# Altium PCB EBC.PcbDoc (part 2 of 2)
Units mil, origin at the board's own origin, x right, y up, seen from the top; angles counter-clockwise.
Board outline 3271.95 x 1972.47 mil, 2 copper layers (Top Layer, Bottom Layer), stack 12.8 mil thick; 145 components, 128 nets, 444 pads, 34 vias.
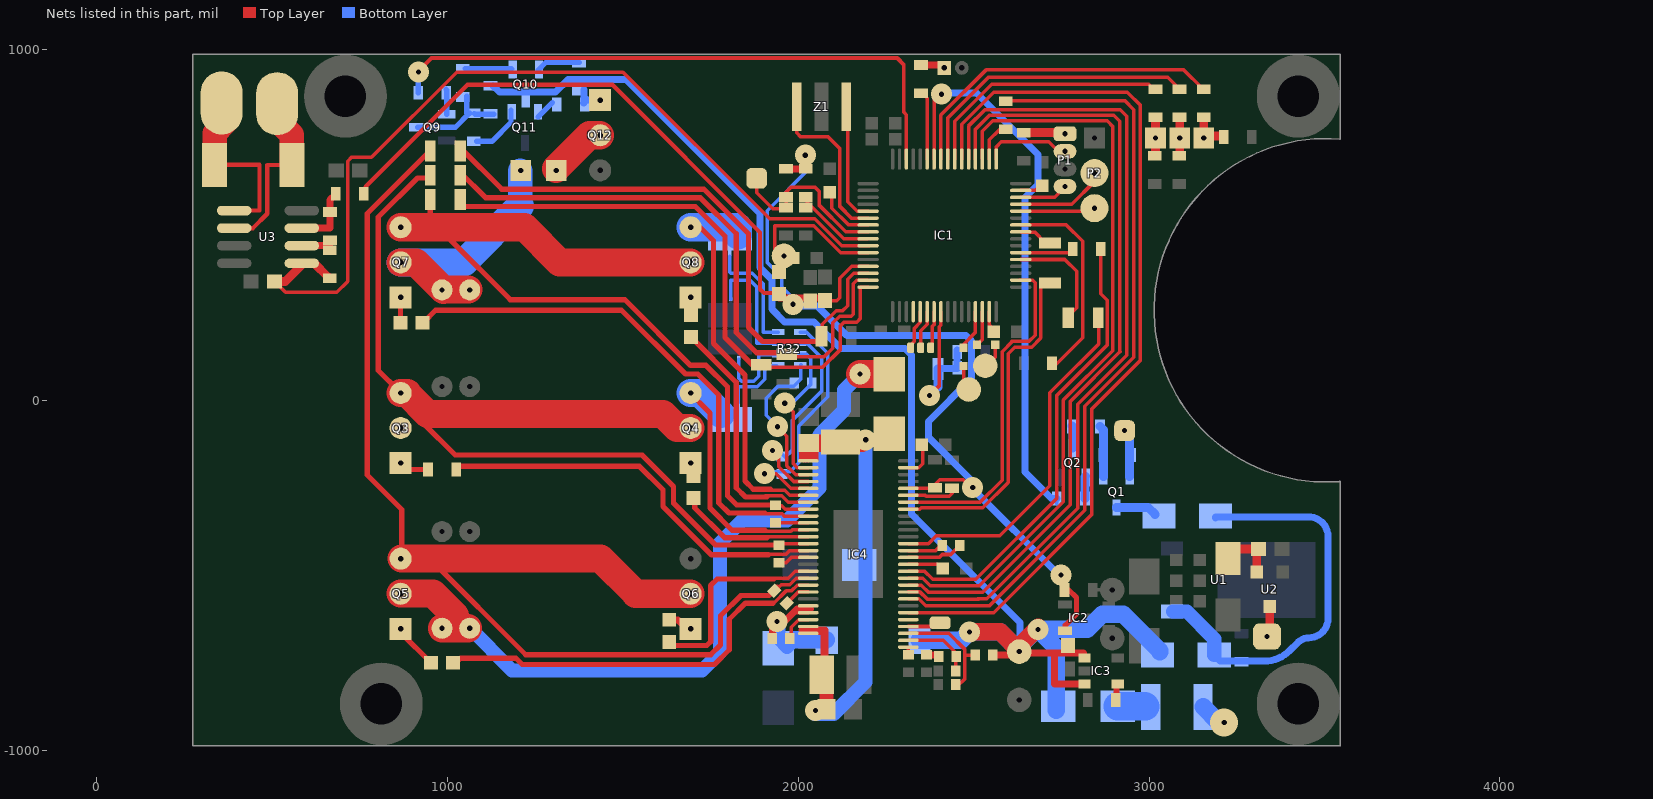
[diagram p2: the nets of this part, all layers, seen from the top]

## Via types
v1: diameter 60, hole 15, Top Layer to Bottom Layer, 33 vias
v2: diameter 80, hole 15, Top Layer to Bottom Layer, 1 vias

## Nets (pads, with @x,y where several pads share a name; then routed paths per layer and width w, separated by ;. In a path a pad name is that pad's centre, name@x,y a point inside that pad or via, vN(x,y) a via of type N, cw(c..) or ccw(c..) an arc to the next point about the centre after c; other vN are vias at no path point) (continued)
_DRV_PWR: C35.1 C36.1 C37.1 C41.1 D5.2 D6.2 IC4.29 IC4.53 IC4.54 | length 1796.2
  Top Layer w10: IC4.29@2006.17,-172.16 C36.1@2006.17,-129.56 ; IC4.29@2015.17,-173.16 C36.1@2015.17,-130.56 ; IC4.29@2021.17,-173.16 C36.1@2021.17,-130.56 ; C36.1@2027.94,-129.33 2028.17,-129.56 2028.17,-130.56 IC4.29@2028.17,-173.16 ; IC4.54@2028.17,-665.28 2068,-665.28 C37.1@2068,-768 ; IC4.29@2038.17,-170.16 C36.1@2038.17,-127.56 ; IC4.29@2048.17,-170.16 C36.1@2048.17,-127.56 ; IC4.29@2052.17,-170.16 C36.1@2052.17,-127.56 ; C37.1@2076.94,-789.33 C37.1@2076.94,-783.33
  Top Layer w20: 2011,-655 2076,-655 2076,-774.12 C37.1@2066.79,-783.33 ; C36.1@2022.79,-125.18 C36.1@2028.17,-130.56 ; v1@2182.54,-122.73 v1(2191.94,-113.33)
  Top Layer w40: v1@2049.2,-889.77 v1(2049.2,-885) ; C41.1@2080.54,-881.33 C37.1@2080.54,-780.73
  Top Layer w50: C36.1@2029.94,-122.73 v1@2182.54,-122.73
  Bottom Layer w40: v1@2047.54,-894.35 2100.92,-894.35 2190.94,-804.33 2190.94,-119.33 2191.94,-118.33 v1(2191.94,-113.33)
_REF: C1.1 C3.1 C17.1 C32.1 IC1.13 IC2.2 IC4.24 R18.1 R22.1 R23.1 R26.2 | length 4445.3
  Top Layer w10: C1.1@2071,284 2072,283 2109,283 2118,292 2118,347 2152.02,381.02 IC1.13@2198.8,381.02 ; IC4.24@2313.6,-251.9 C32.1@2389.37,-251.9 ; C32.1@2389.94,-240.33 2402.94,-227.33 2469.94,-227.33 v1@2496.94,-254.33
  Top Layer w12: R26.2@766,584 766,608 1057,899 1470,899 1891,478 1891,316 1902,305 R22.1@1942,305
  Top Layer w15: v1(2749,-499) 2749,-493.27 2760.94,-481.33 2760.94,-541.33 2770.94,-541.33 2792.94,-563.33 2792.94,-610.33 2760.94,-642.33 IC2.2@2760.94,-656.33
  Top Layer w20: R22.1@1944.33,290.44 C1.1@2080.83,290.44 ; R18.1@1965,659 R23.1@2021,659 2022,659 2028,665 2020,673 v1(2020,698)
  Bottom Layer w10: v1(1985,273) 1985,290 1952,323 1952,351 1911,392 1911,540 2031,660 v1@2031,697
  Bottom Layer w20: v1@2001,273 2006,268 2054,268 2138,184 2478,184 2493,169 2493,61 2371,-61 2371,-106 2496.94,-231.94 v1(2496.94,-249.33) 2496.94,-252.94 2736,-492 v1@2749,-492
AN_IN: C8.1 IC1.24 R14.2 R15.1 | length 448.4
  Top Layer w10: v1(2374,13) 2401,40 2401,208 2406.47,213.47 IC1.24@2406.47,252.08
  Bottom Layer w20: R14.2@2398.09,88 2398.09,90 R15.1@2452,90 ; C8.1@2452,143 R15.1@2452,90 ; R15.1@2453,90 R15.1@2452,90
  Bottom Layer w25: v1(2374,13) 2398,37 R14.2@2398,89
BUCK: C9.1 C11.1 D1.1 D2.1 IC3.1 IC3.3 L1.2 Q10.3 R31.1 R48.1 | length 4424.5
  Top Layer w20: R31.1@2554,-727 2612,-727 C9.1@2620,-719 ; C9.1@2632,-709 C9.1@2653.27,-709 ; C9.1@2634.33,-721.33 2729.94,-721.33 ; IC3.1@2812.94,-733.33 2812.94,-721.33 2729.94,-721.33 ; IC3.3@2815.69,-809.73 2729.94,-809.73 2729.94,-721.33
  Top Layer w50: v1(2488,-661) 2575,-661 C9.1@2629,-715 ; C9.1@2630,-717.1 C9.1@2630,-703 ; C9.1@2630,-702 v1@2684,-648
  Bottom Layer w20: R48.1@1130,896 1148,878 1308,878 1344,914 1509,914 1890,533 1890,378 1925,343 1925,259 1961,223 2045,223 2121,147 2304,147 2322.83,128.17 2322.83,-324.8 2632,-633.97 C9.1@2632,-717
  Bottom Layer w50: L1.2@2344.83,-684.33 2464.67,-684.33 v1(2488,-661) 2576,-661 C9.1@2632,-717 ; C9.1@2630,-703 v1@2684,-649 ; v1@2680,-655 2684,-655 2735,-706 D1.1@2735,-885 ; v1(2683,-654) 2823,-654 2866,-611 2926,-611 3030,-715 D2.1@3030,-717
CUR_GLBL: C26.1 IC1.10 R25.1 U3.5 | length 2560.1
  Top Layer w10: C26.1@508,337 538,307 684,307 715,338 715,681 726,692 783,692 1026,935 1500,935 1918,517 2047,517 2124,440 IC1.10@2202,440
  Top Layer w25: C26.1@508,338 537,338 U3.5@585,386 ; U3.5@584.46,390 620,390 R25.1@659,351
DC_CAL: IC4.12 R8.2 | length 1304.5
  Top Layer w10: IC4.12@2313.6,-488.12 2359.72,-488.12 2382.94,-511.33 2500,-511.33 ; 2502,-511 2506,-511 2736,-281 2736,12.61 2880.33,156.94 2880.33,284.94 2862.33,302.94 R8.2@2862.33,430.94
DM: IC1.44 P2.3 | length 215.1
  Top Layer w10: IC1.44@2633.84,538.5 2829.89,538.5 P2.3@2843.33,551.94
DP: IC1.45 P2.2 | length 270.3
  Top Layer w10: IC1.45@2633.83,558.18 2779.57,558.18 2844.33,622.94 P2.2@2844.33,646.94 P2.2@2844.33,655.94
EN_GATE: IC4.16 R7.2 | length 1028
  Top Layer w10: IC4.16@2313.6,-409.38 2370.89,-409.38 2392.94,-387.33 2514.94,-387.33 ; 2509,-387 2574,-387 2717,-244 2717,21 2737.94,41.94 2738.33,41.94 2856.33,159.94 2856.33,246.94 R7.2@2855.33,245.94
FAULT: IC1.54 IC4.6 | length 2528.3
  Top Layer w10: IC4.6@2313.6,-606.23 2499.84,-606.23 ; IC1.54@2465.53,687.12 2465.53,786.53 2556.94,877.94 2937.33,877.94 2975.33,839.94 2975.33,113.94 2837,-24.39 2837,-326 2557,-606 2497,-606
FUSE_OUT: F1.2 | length 78.4
  Bottom Layer w50: F1.2@3153.8,-875 3197.8,-919 v2(3214,-919)
HALL1: IC1.55 R10.1 | length 721.4
  Top Layer w10: IC1.55@2445.84,687.12 2445.84,794.84 2551,900 2999,900 R10.1@3011,888
HALL2: IC1.56 R11.1 | length 834.3
  Top Layer w10: IC1.56@2426.16,687.12 2426.16,804.16 2542,920 3053,920 R11.1@3083,890
HALL3: IC1.57 R12.1 | length 943.2
  Top Layer w10: IC1.57@2406.47,687.12 2406.47,812.47 2535,941 3099,941 R12.1@3150,890
LED_1: IC1.59 R9.1 | length 200.8
  Top Layer w10: R9.1@2348,880 2367.1,860.9 IC1.59@2367.1,687.12
Net1_1: 1.1 Q1.2 R20.2 | length 136.9
  Bottom Layer w25: 1.1@2927,-88 2944.4,-105.4 Q1.2@2944.4,-217.71
Net2_1: 2.1 U2.3 | length 99.6
  Top Layer w25: U2.3@3344,-588.21 3344,-685 2.1@3346,-687
NetC4_1: C4.1 IC1.47 | length 68.1
  Top Layer w10: IC1.47@2633.84,597.55 2675.94,597.55 C4.1@2694.33,615.94
NetC5_1: C5.1 IC1.31 | length 59.4
  Top Layer w10: IC1.31@2544.27,252.08 2544.27,214 C5.1@2559.33,198.94
NetC18_1: C18.1 IC3.4 | length 44
  Top Layer w18: C18.1@2906.94,-854.33 IC3.4@2906.94,-810.33
NetC21_1: C21.1 D2.2 D3.2 U1.1 | length 1168.8
  Bottom Layer w20: D2.2@3185.71,-727 3202.71,-744 3329.58,-744 ccw(c3329.58,-644) 3400.29,-714.71 3424.27,-690.73 cw(c3455,-721.46) 3455,-678 ccw(c3455,-623) 3510,-623 3510,-389 ccw(c3454,-389) 3454,-333 3192,-333 ccw(c3192,-336) D3.2@3189,-336
  Bottom Layer w40: U1.1@3068,-603 3108,-603 3185.71,-680.71 D2.2@3185.71,-727
NetC24_1: C24.1 D4.1 U2.2 | length 143.3
  Top Layer w25: D4.1@3233,-432 3240,-425 3308,-425 3306.6,-426.4 U2.2@3306.6,-489.79
NetC27_2: C27.2 IC4.2 R28.2 | length 200
  Top Layer w10: IC4.2@2313.6,-684.97 2413.57,-684.97 2448.94,-720.33 C27.2@2448.94,-770.33
NetC28_2: C28.2 R28.1 | length 34
  Top Layer w19.68: C28.2@2365.94,-726.33 2365.94,-727.33 R28.1@2398.94,-727.33
NetC29_1: C29.1 IC4.14 | length 161.6
  Top Layer w10: IC4.14@2313.6,-448.75 2401.52,-448.75 2409.94,-440.33 2434.94,-440.33 C29.1@2460.94,-414.33
NetC29_2: C29.2 IC4.15 | length 98.4
  Top Layer w10: IC4.15@2313.6,-429.06 2391.2,-429.06 C29.2@2405.94,-414.33
NetC30_2: C30.2 IC4.13 | length 106.3
  Top Layer w10: IC4.13@2313.6,-468.43 2396.04,-468.43 C30.2@2412.94,-485.33
NetC31_1: C31.1 IC4.23 | length 146.2
  Top Layer w10: IC4.23@2313.6,-271.58 2361.19,-271.58 2363.94,-274.33 2429.94,-274.33 2438.94,-265.33 C31.1@2438.94,-249.33
NetC33_1: C33.1 IC4.27 | length 98.1
  Top Layer w10: IC4.27@2313.6,-192.84 2343.43,-192.84 2354.94,-181.33 C33.1@2354.94,-129.33
NetC34_1: C34.1 D7.2 IC4.50 IC4.51 L1.1 | length 442.6
  Top Layer w10: v1@1958.44,-633.83 1986.04,-606.23 IC4.51@2028.16,-606.23
  Top Layer w20: C34.1@1925.94,-675.33 1925.94,-645.33 v1@1939.44,-631.83 ; v1(1938.94,-631.33) 1960.67,-631.33 1996,-596 2034,-596
  Bottom Layer w40: v1@1942.94,-631.33 1942.94,-678.33 1967.94,-703.33 D7.2@1987.94,-683.33
  Bottom Layer w50: D7.2@1987.94,-683.33 L1.1@2079.94,-683.33
NetC34_2: C34.2 IC4.52 | length 84.1
  Top Layer w10: C34.2@1979.94,-674.33 1979.94,-647.33 2001.35,-625.91 IC4.52@2028.17,-625.91
NetC38_2: C38.2 IC4.38 | length 82.6
  Top Layer w10: C38.2@1945.94,-349.33 1946.93,-350.32 IC4.38@2028.16,-350.32
NetC39_2: C39.2 IC4.48 | length 82
  Top Layer w10: C39.2@1961.94,-585.33 2000.09,-547.17 IC4.48@2028.17,-547.17
NetC40_2: C40.2 IC4.43 | length 81.3
  Top Layer w10: C40.2@1952.94,-463.33 1964.94,-463.33 1979.52,-448.75 IC4.43@2028.16,-448.75
NetC42_1: C42.1 IC4.30 R32.3 | length 444.7
  Top Layer w10: v1(1961.2,-9) 1985.2,-33 1985.2,-181 1997.05,-192.84 IC4.30@2028.17,-192.84
  Bottom Layer w10: v1@1961,-15 1968,-22 1969,-22 2036,45 2036,118 2023.25,130.75 R32.3@2005.5,130.75 ; R32.3@2005,131 R32.3@2005.5,131
NetC42_2: C42.2 IC4.31 R32.1 | length 454.3
  Top Layer w10: v1(1940.2,-76) 1967.2,-103 1967.2,-187.6 ; 1970.2,-191 1967.2,-188 1967.2,-187.6 ; IC4.31@2028.17,-212.53 1992.13,-212.53 1967.2,-187.6
  Bottom Layer w10: v1@1936,-71 1908,-43 1908,5 1942,39 1987,39 2007,59 2007,100 R32.1@2008,101 ; v1@1949,-72 v1@1952,-75
NetC43_1: C43.1 IC4.33 R32.7 | length 700.1
  Top Layer w10: v1(1903.2,-210) 1936.61,-210 1978.5,-251.9 IC4.33@2028.16,-251.9
  Bottom Layer w10: v1@1904,-205 1975,-205 2001,-179 2001,-74 2084,9 2084,133 2023.26,193.74 R32.7@2005.5,193.74
NetC43_2: C43.2 IC4.32 R32.5 | length 577.3
  Top Layer w10: v1@1943.91,-163.7 1943.91,-189.7 1986.42,-232.21 IC4.32@2028.16,-232.21
  Bottom Layer w10: v1@1922,-153 1953,-153 1963,-163 1982,-144 1982,-59 2066,25 2066,121 2024.76,162.24 R32.5@2005.5,162.24
  other v1: 1926.2,-144
NetC46_2: C46.2 C47.1 C48.2 C49.1 D6.1 J6.1 Q3.2 Q5.2 Q7.2 R14.1 | length 3003.3
  Top Layer w80: Q5.2@866,-552 959,-552 1020.93,-613.93 ; Q7.2@866.14,392.7 909.3,392.7 988,314 989,315 C46.2@1059,315 ; C48.2@984.25,-650.61 1057.61,-650.61 C49.1@1058,-651 ; v1(2176,74) 2176.35,73.65 D6.1@2259,73.65
  Bottom Layer w20: v1@2172,75 R14.1@2283.91,75
  Bottom Layer w40: C49.1@1062,-649 1184,-771 1725,-771 1776,-720 1776,-407 1840,-343 1968,-343 2060,-251 2060,-99 2130,-29 2130,28 v1(2176,74)
  Bottom Layer w70: 1206.63,552.63 J6.1@1206.63,653.42
  Bottom Layer w80: Q7.2@866.14,392.7 1046.7,392.7 1206.63,552.63
NetD1_2: D1.2 F1.1 | length 78.8
  Bottom Layer w80: D1.2@2910.64,-873 2988,-873 F1.1@2989,-874
NetD3_1: D3.1 Q1.3 | length 118.2
  Bottom Layer w25: Q1.3@2907,-306.29 2997.29,-306.29 D3.1@3017,-326
NetIC1_5: IC1.5 Z1.1 | length 340.2
  Top Layer w10: Z1.1@2142,836 2141,835 2141,565 2167.5,538.5 IC1.5@2198.8,538.5
NetIC1_6: IC1.6 Z1.3 | length 494.7
  Top Layer w10: Z1.3@1991,854 1995,850 1995,762 2007,750 2085,750 2118.63,716.37 2118.63,551.63 2151.46,518.81 IC1.6@2198.8,518.81
NetIC1_14: IC1.14 R38.1 R39.1 | length 1692.3
  Top Layer w10: R39.1@2068,178 2068,215.8 2108.21,255 2126,255 2140.33,269.33 2140.33,343.94 2157.72,361.33 IC1.14@2198.8,361.33
  Top Layer w15: R38.1@1035.74,720 1154.74,601 1731,601 1858,474 ; 1858,473 1858,207 1898,167 2060,167 R39.1@2068,175
NetIC1_15: IC1.15 R36.1 R37.1 | length 1702.3
  Top Layer w10: R37.1@1979,128 1983,124 2074,124 2098,148 2098,220.47 2117.56,239 2151,239 2156.33,244.33 2156.33,331.94 2166.33,341.94 IC1.15@2197.33,341.94
  Top Layer w15: R36.1@1035.74,649.26 1108,577 1720,577 1823,474 1823,193 1881.5,134.5 R37.1@1956.5,134.5
NetIC1_16: IC1.16 R40.1 R41.1 | length 1663.7
  Top Layer w10: R41.1@1905,93 2069,93 2120,144 2120,212 2130,222 2166,222 2177,233 2177,321.96 IC1.16@2198.8,321.96
  Top Layer w15: R40.1@1050,552 1706,552 1791,467 1791,178 1871,98 R41.1@1875.8,98
NetIC1_29: IC1.29 R5.1 | length 108.5
  Top Layer w10: R5.1@2470,158 2504.9,192.9 IC1.29@2504.9,252.08
NetIC1_30: IC1.30 R6.1 | length 101.5
  Top Layer w10: R6.1@2509,157 2524.58,172.58 IC1.30@2524.58,252.08
NetIC1_34: IC1.34 IC4.22 | length 971.7
  Top Layer w10: IC4.22@2313.6,-291.27 2518,-291.27 2581,-228.27 2581,138 2609,166 ; 2608.33,166.94 2657.33,166.94 2675.33,184.94 2675.33,334.94 2668.33,341.94 IC1.34@2630.33,341.94
NetIC1_37: IC1.37 R7.1 | length 318.5
  Top Layer w10: IC1.37@2633.83,400.7 2759.57,400.7 2793.33,366.94 2793.33,262.94 R7.1@2764.33,233.94
NetIC1_38: IC1.38 R8.1 | length 152.9
  Top Layer w10: IC1.38@2633.83,420.39 2771.78,420.39 R8.1@2782.33,430.94
NetIC1_41: IC1.41 R2.2 | length 81.4
  Top Layer w10: IC1.41@2635.33,478.94 2674.33,478.94 R2.2@2704.33,448.94
NetIC1_42: IC1.42 R3.2 | length 593.7
  Top Layer w10: IC1.42@2633.84,499.13 2764.14,499.13 2810.33,452.94 2810.33,177.94 R3.2@2723.33,90.94
NetIC1_50: IC1.50 R4.2 | length 113.4
  Top Layer w10: IC1.50@2544.27,687.12 2544.27,741.87 2572.33,769.94 R4.2@2591.33,769.94
NetIC1_62: IC1.62 R47.1 | length 1739.3
  Top Layer w10: 2300,820 2300,957 ; 2301,820 2308.05,812.95 IC1.62@2308.05,687.12
  Top Layer w12: v1@916,937 954,975 2282,975 2300,957
  Bottom Layer w15: R47.1@916.25,875.98 916.25,934.41 v1(916.88,935.04)
NetIC4_1: IC4.1 R30.1 | length 26.7
  Top Layer w10: R30.1@2313.6,-731.33 IC4.1@2313.6,-704.65
NetIC4_3: IC4.3 R29.1 R31.2 | length 322.5
  Top Layer w10: IC4.3@2313.6,-665.28 2428.89,-665.28 2474.94,-711.33 2474.94,-728 ; R29.1@2452,-817 2474.94,-794.06 2474.94,-728 ; R31.2@2501,-726 2499,-728 2474.94,-728
NetIC4_4: IC4.4 pad.4 | length 86
  Top Layer w10: IC4.4@2313.6,-645.6 2380.4,-645.6 pad.4@2394,-632
NetIC4_5: IC4.5
NetIC4_21: IC4.21 R2.1 | length 948.8
  Top Layer w10: IC4.21@2313.6,-310.95 2346.31,-310.95 2349.94,-307.33 2526,-307.33 ; 2526,-307 2598,-235 2598,131.61 2617.33,150.94 2665.33,150.94 2691.33,176.94 2691.33,319.94 R2.1@2699.33,327.94
NetJ1_1: J1.1 R10.2 R13.1 | length 103.8
  Top Layer w25: R13.1@3016,703 3018,705 J1.1@3018,747 R10.2@3018,806
NetJ2_1: J2.1 R11.2 R16.1 | length 106
  Top Layer w25: R16.1@3087,700 J2.1@3087,747 R11.2@3087,806
NetJ3_1: J3.1 R12.2 R17.1 | length 109.1
  Top Layer w25: R12.2@3156,806 3156,753 3205,753 R17.1@3210,748
NetJ7_1: J7.1 Q12.2 | length 331
  Top Layer w80: J7.1@1309.06,659.45 1404.61,755 Q12.2@1435,755
  Bottom Layer w70: J7.1@1309.06,659.45 1404.61,755 Q12.2@1435,755
NETLABEL23: IC1.20
NETLABEL24: IC1.21 pad.2@2320,149 | length 105
  Top Layer w10: pad.2@2321,158 2330,167 2330,204 2347.42,221.42 IC1.21@2347.42,252.08
NETLABEL25: IC1.22 pad.2@2348.5,149 | length 112.6
  Top Layer w10: pad.2@2349,147 2349,198 2367.1,216.1 IC1.22@2367.1,252.08
NETLABEL26: IC1.23 pad.2@2377,149 | length 105.5
  Top Layer w10: pad.2@2376,151 2382,157 2382,210 2386.79,214.79 IC1.23@2386.79,252.08
NetNT2_1: NT2.1 R32.2 | length 204.9
  Bottom Layer w10: NT2.1@1828,-7.16 1828,19 ; 1828,14 1828,19 ; R32.2@1938,98 1904,98 1904,59 1883,38 1833,38 1828,33 1828,19
NetNT3_1: NT3.1 R32.4 | length 239.5
  Bottom Layer w10: NT3.1@1830,117 1830,62 1838,54 1873,54 1887,68 1887,129 1943,129 R32.4@1944,130
NetNT4_1: NT4.1 R32.8 | length 334.4
  Bottom Layer w10: 1805,410 1805,364 1807,362 1869,362 1900,331 1900,193.74 R32.8@1942.5,193.74
NetNT5_1: NT5.1 R32.6 | length 357.5
  Bottom Layer w10: NT5.1@1807,288 1807,342 1862,342 1882,322 1882,162.24 R32.6@1942.51,162.24
NetP1_1: P1.1 R1.1 | length 123.7
  Top Layer w25: R1.1@2638.33,762.94 2756.33,762.94 P1.1@2760.33,758.94
NetP3_1: P3.1 R9.2 | length 68.7
  Top Layer w20: R9.2@2352,955 2408,955 P3.1@2416,947 P3.1@2417,946
NetQ1_1: Q1.1 R20.1 R21.2 | length 146.7
  Bottom Layer w25: R21.2@2860,-75 2869.6,-84.6 Q1.1@2869.6,-217.71
NetQ2_1: Q2.1 R19.1 | length 64.8
  Bottom Layer w25: R19.1@2817,-281 2817,-219 Q2.1@2819,-217
NetQ2_3: Q2.3 R21.1 | length 64.5
  Bottom Layer w25: R21.1@2780,-74 2782,-76 Q2.3@2782,-137.66
NetQ3_1: Q3.1 R33.2 | length 94.8
  Top Layer w15: Q3.1@859,-174.74 882.11,-197.85 R33.2@944.25,-197.85
NetQ4_1: Q4.1 R34.2 | length 2.8
  Top Layer w15: Q4.1@1691,-173.74 Q4.1@1693,-175.74
NetQ5_1: Q5.1 R43.2 | length 134.7
  Top Layer w15: Q5.1@869,-649 869,-665.28 R43.2@952.76,-749.03
NetQ6_1: Q6.1 R42.2 | length 60.6
  Top Layer w20: R42.2@1632,-626.5 1656.5,-626.5 Q6.1@1682,-652
NetQ7_1: Q7.1 R45.2 | length 67.6
  Top Layer w15: Q7.1@864,287.52 865.5,286.02 R45.2@865.5,220.52
NetQ8_1: Q8.1 R44.2 | length 59.2
  Top Layer w25: R44.2@1694.5,238 1694.5,296.5 Q8.1@1695,297
NetQ9_1: Q9.1 R47.2 | length 71.7
  Bottom Layer w15: R47.2@995.62,885.83 997.59,883.86 Q9.1@997.59,814.96
NetQ9_3: Q9.3 R48.2 R49.2 R50.1 | length 278
  Bottom Layer w15: Q9.3@914.91,777.56 1022.56,777.56 1062.87,817.87 1054.36,818.56 R49.2@1054.36,866.51 ; R50.1@1076,817 1078,815 R48.2@1132,815
NetQ10_1: Q10.1 R49.1 | length 133.6
  Bottom Layer w15: R49.1@1050,945.51 1181.49,945.51 Q10.1@1183,944
NetQ10_2: Q10.2 R51.2 | length 126.1
  Bottom Layer w15: Q10.2@1258,940 1280,962 R51.2@1375,962
NetQ11_1: Q11.1 R50.2 | length 155.4
  Bottom Layer w15: R50.2@1083,737.56 1126.56,737.56 1181.1,792.1 Q11.1@1181.1,826.77
NetQ11_2: Q11.2 R52.2 | length 58.5
  Bottom Layer w15: Q11.2@1257.87,806.96 R52.2@1299.21,848.3
NetQ12_1: Q12.1 R51.1 R52.1 | length 76.3
  Bottom Layer w20: R52.1@1388.11,846.77 1388.43,847.09 R51.1@1388.43,885 ; R52.1@1397.64,856.3 1398.94,855 Q12.1@1435,855
NetR24_1: R24.1 R26.1 U3.7 | length 181.3
  Top Layer w20: U3.7@584.46,490 665,490 R24.1@665,536 665,571 R26.1@679,585
NetR24_2: R24.2 R25.2 U3.6 | length 88.5
  Top Layer w20: U3.6@584.46,440 664,440 R25.2@664,431
NetR27_2: pad.3@514,845 R27.2 U3.2 | length 495.8
  Top Layer w12: U3.2@391.54,490 445,490 486,531 486,670 R27.2@556.24,670
  Top Layer w70: pad.3@510,826 510,802 556.24,755.76 R27.2@556.24,670
PHASE_1: C40.1 IC4.41 Q3.3 Q4.2 R36.2 | length 2951.2
  Top Layer w10: C40.1@1949.94,-414.33 1954.89,-409.38 IC4.41@2028.17,-409.38
  Top Layer w15: Q3.3@860,27 802,85 802,521 914,633 R36.2@952,633 ; Q3.3@881,24.26 885,20.26 930,-24.74 930,-65 1022,-157 1554.64,-157 1644,-246.36 1644,-294 1763.33,-413.33 C40.1@1930,-413.33 ; R36.2@946.61,645.13 R36.2@950.74,649.26
  Top Layer w80: Q3.3@866.14,20.26 885,20.26 885,19 943.37,-39.37 1614.17,-39.37 1654.54,-79.74 Q4.2@1692.91,-79.74
PHASE_2: C39.1 IC4.46 Q5.3 Q6.2 R38.2 | length 3500.9
  Top Layer w10: C39.1@1927.94,-549.33 1950.94,-526.33 1974.94,-526.33 1993.46,-507.8 IC4.46@2028.17,-507.8
  Top Layer w15: Q5.3@870,-453 869.18,-452.18 869.18,-312.18 771,-214 771,532 945,706 R38.2@945,714.26 ; R38.2@945,721 R38.2@945,714.26 ; R38.2@950.74,720 R38.2@945,714.26 ; 956,-459 1223,-726 1750,-726 1778,-698 1778,-615 1836,-557 1916,-557 C39.1@1940,-533
  Top Layer w80: Q5.3@869.18,-452.18 1436.43,-452.18 1536.43,-552.18 Q6.2@1692.91,-552.18
PHASE_3: C38.1 IC4.36 Q7.3 Q8.2 R40.2 | length 2494.9
  Top Layer w10: C38.1@1937.94,-296.33 1942.94,-301.33 1952.94,-301.33 1962.56,-310.95 IC4.36@2028.17,-310.95
  Top Layer w15: R40.2@950.74,572 950.74,505.26 953,503 ; 1038,494.52 1004.24,460.76 1179,286 1505.34,286 1692.34,99 1737,99 1798,38 1798,-273 1824.33,-299.33 C38.1@1920,-299.33
  Top Layer w80: Q7.3@866.14,492.7 1218.9,492.7 1318.9,392.7 Q8.2@1692.91,392.7
PWR_ON: IC1.58 R19.2 | length 1617
  Top Layer w10: IC1.58@2386.79,687.12 v1@2386.79,882 ; v1(2408,872) 2408,889.58 v1@2411,892.58
  Bottom Layer w10: R19.2@2737,-295 R19.2@2737,-281
  Bottom Layer w20: v1@2412,875 2508,875 2683,700 2683,615 2646,578 2646,-205 2722,-281 R19.2@2737,-281
RESET: C2.1 IC1.7 | length 172.5
  Top Layer w10: C2.1@2095,596 2095,547.27 2143.14,499.13 IC1.7@2198.8,499.13
RS+: pad.3@356,847 R27.1 U3.1 | length 471.8
  Top Layer w12: R27.1@331,671 335.76,671 464,671 464,540 U3.1@391.54,540
  Top Layer w70: R27.1@335.76,671 335.76,760.76 pad.3@368,793
RX: pad.2@2533,98 R6.2 | length 62.9
  Top Layer w10: pad.2@2542,103 2561,122 R6.2@2561,158
S\P\I\_\C\S\: IC4.8 R4.1 | length 2205.1
  Top Layer w10: IC4.8@2313.6,-566.86 2343.47,-566.86 2362.94,-586.33 2506.94,-586.33 ; 2503,-586 2545,-586 2817,-314 2817,-17.39 2956.33,121.94 2956.33,827.94 2931.33,852.94 R4.1@2589.33,852.94
SPI_MISO: IC1.52 IC4.10 | length 2246.6
  Top Layer w10: IC4.10@2313.6,-527.49 2350.09,-527.49 2370.94,-548.33 2525.67,-548.33 2775,-299 2775,-4 2916.33,137.33 ; IC1.52@2504.9,687.12 2504.9,771.9 2544.94,811.94 2899.33,811.94 2916.33,794.94 2916.33,137.33 ; 2917,138 2916.33,137.33
SPI_MOSI: IC1.53 IC4.9 | length 2347.5
  Top Layer w10: IC4.9@2313.6,-547.17 2346.78,-547.17 2366.94,-567.33 2513.94,-567.33 ; IC1.53@2485.21,687.12 2485.21,781.21 2531.94,827.94 2917.33,827.94 2936.33,808.94 2936.33,127.94 2796,-12.39 2796,-308 2537,-567 2512,-567
SPI_SCK: IC1.51 IC4.11 | length 2146.8
  Top Layer w10: IC4.11@2313.6,-507.8 2354.41,-507.8 2375.94,-529.33 2515.67,-529.33 2755,-290 2755,0 2896,141 2896,161 ; IC1.51@2524.33,687.94 2524.33,765.94 2554.33,795.94 2880.33,795.94 2896.33,779.94 2896.33,161
SWCLK: IC1.49 P1.2 | length 248
  Top Layer w10: IC1.49@2563.95,687.12 2563.95,721.56 2578.33,735.94 2714.33,735.94 2741.33,708.94 P1.2@2760.33,708.94
SWDIO: IC1.46 P1.4 | length 138.5
  Top Layer w10: IC1.46@2633.83,577.87 2731.26,577.87 P1.4@2760.33,606.94
TEMP_EATER: C19.1 IC1.9 R23.2 | length 232.7
  Top Layer w10: R23.2@2021,579 2021,568 2129,460 IC1.9@2198,460
TEMP_FET: C16.1 IC1.11 J5.1 R22.2 | length 431.6
  Top Layer w10: R22.2@1954.33,365.94 R22.2@1955.33,365.94 ; C16.1@1981,411 1937,411 1932,416 1932,497 2044,497 2120.61,420.39 IC1.11@2198.8,420.39
TEMP_WHEEL: C13.1 IC1.8 J4.1 R18.2 | length 487
  Top Layer w10: J4.1@1881,632 1881,591 1927,545 C13.1@1959,545 ; R18.2@1961,587 1961,589 1978,606 2048,606 2059,595 2059,556 2135.56,479.44 IC1.8@2198.8,479.44 ; R18.2@1963,575 1965,573 C13.1@1965,549
TX: pad.2@2486,30 R5.2 | length 71.8
  Top Layer w10: R5.2@2471,97 2471,45 pad.2@2485,31
UH_P: IC4.42 R33.1 | length 1140.1
  Top Layer w10: 1918.94,-439.33 1964.94,-439.33 1975.2,-429.06 IC4.42@2028.17,-429.06
  Top Layer w15: R33.1@1024.25,-197.85 1033.1,-189 1547.27,-189 1614.17,-255.91 1614.17,-303.17 1752.33,-441.33 1915,-441.33
UL_N: IC4.39 NT2.2 Q4.3 R35.1 | length 788
  Top Layer w10: 1895.94,-374.33 1978.94,-374.33 1983.26,-370.01 IC4.39@2028.16,-370.01
  Top Layer w15: Q4.3@1686,25.26 1748,-36.74 ; 1748,-37 1748,-308 1811.33,-371.33 1905,-371.33
  Bottom Layer w80: Q4.3@1692.91,20.26 1719.74,20.26 R35.1@1780,-40
UL_P: IC4.40 R34.1 | length 378.9
  Top Layer w10: 1915.94,-389.69 IC4.40@2028.17,-389.69
  Top Layer w15: R34.1@1704.5,-281.5 1704.5,-307.5 1789.33,-392.33 1910,-392.33
VH_P: IC4.47 R43.1 | length 1160
  Top Layer w10: 1930.94,-578.33 1964.94,-544.33 1979.94,-544.33 1996.78,-527.49 IC4.47@2028.17,-527.49
  Top Layer w15: R43.1@1023,-750 1037,-736 1195,-736 1213,-754 1761,-754 1803,-712 1803,-625 1849,-579 1928,-579
VL_P: IC4.45 R42.1 | length 570.9
  Top Layer w10: 1925.94,-508.33 1970.94,-508.33 1991.15,-488.12 IC4.45@2028.16,-488.12
  Top Layer w15: R42.1@1642,-700 1739,-700 1750,-689 1750,-529 1768.67,-510.33 1930,-510.33
WH_P: IC4.37 R45.1 | length 1532.4
  Top Layer w10: 1905.94,-324.33 1953.94,-324.33 1960.24,-330.64 IC4.37@2028.16,-330.64
  Top Layer w15: R45.1@931,221.52 965.39,255.91 1496.06,255.91 1677.97,74 1713,74 1773,14 1773,-293 1802.33,-322.33 1905,-322.33
WL_N: IC4.34 NT4.2 Q8.3 R46.1 | length 1154.7
  Top Layer w10: 1923.18,-257.33 1960.94,-257.33 1975.19,-271.58 IC4.34@2028.17,-271.58
  Top Layer w15: Q8.3@1692.91,492.7 1719.3,492.7 1758,454 1758,161 1848,71 1848,-231 1871.33,-254.33 1920,-254.33
  Bottom Layer w80: Q8.3@1692.91,492.7 1828,492.7 R46.1@1828,469
WL_P: IC4.35 R44.1 | length 710.9
  Top Layer w10: 1905.94,-273.33 1952.94,-273.33 1970.87,-291.27 IC4.35@2028.17,-291.27
  Top Layer w15: R44.1@1694,179.5 1823,50.5 1823,27 1822,26 ; 1823,26 1823,-250 1849.33,-276.33 1910,-276.33
pads on no net: IC1.2 IC1.3 IC1.4 IC1.17 IC1.25 IC1.28 IC1.33 IC1.39 IC1.40 IC1.61 IC4.55 IC4.56

## Polygon pours and split planes (outlines as drawn)
_CTRL_GND on Bottom Layer "btm_-" (solid, remove dead copper, pour order 2): 275.59,984.25 275.59,-984.25 3542.84,-984.25 3542.84,984.25
NetC46_2 on Bottom Layer "btm_48" (solid, remove dead copper, pour order 0): 1265,687.57 1265,177.17 927.74,177.17 927.74,-511.81 1265,-511.81 1265,-802 1023.62,-802 927.74,-706.12 314.96,-706.12 314.96,687.98
PHASE_1 on Top Layer "111" (solid, remove dead copper, pour order 10): 885.83,-19.68 1003.94,-137.8 1062.99,-137.8 1712.6,-137.8 1732.28,-118.11 1732.28,-59.06 1732.28,-39.37 1712.6,-19.68 1653.54,-19.68 1633.86,-19.68 1614.17,0 885.83,0
PHASE_2 on Top Layer "11" (solid, remove dead copper, pour order 8): 944.88,-452.76 1181.1,-688.98 1594.49,-688.98 1633.86,-688.98 1712.6,-610.24 1732.28,-590.55 1732.28,-511.81 1653.54,-511.81 1555.12,-413.39 944.88,-413.39 944.88,-452.76
PHASE_3 on Top Layer "1" (solid, remove dead copper, pour order 6): 984.25,492.13 1161.42,314.96 1496.06,314.96 1692.91,314.96 1732.28,354.33 1732.28,433.07 1712.6,433.07 1614.17,531.5 1023.62,531.5
_CTRL_GND on Top Layer "TOP-" (solid, remove dead copper, pour order 4): 275.59,984.25 275.59,-984.25 3541.79,-984.25 3541.79,984.25

## Other copper
Top Layer:
  pour cut-out: 3499.27,744.7 3500,743.97 3500,745 3494,745 ccw(c3494,263) 3012,263 3012,243 ccw(c3492,243) 3492,-237 3762,-237 ccw(c3762,-159) 3840,-159 3840,614 ccw(c3703,614) 3659.67,743.97 3521.08,743.97 ccw(c3515.54,737.09) 3511.04,744.7 ccw(c3505.16,736.2)
Bottom Layer:
  pour cut-out: 158,66 158,-53 309,-53 309,63 161,63
  pour cut-out: 3499.27,744.7 3500,743.97 3500,745 3494,745 ccw(c3494,263) 3012,263 3012,243 ccw(c3492,243) 3492,-237 3762,-237 ccw(c3762,-159) 3840,-159 3840,614 ccw(c3703,614) 3659.67,743.97 3521.08,743.97 ccw(c3515.54,737.09) 3511.04,744.7 ccw(c3505.16,736.2)
  pour cut-out: 2070.94,-552.33 2346.94,-552.33 2346.94,-809.33 2071.94,-809.33 2071.94,-553.33

## Silkscreen, mask and mechanical layers (free items; w line width, h text height)
Top Overlay:
  lines w3.94: 0,-788 0,789 ; 0,-787.4 196.85,-984.25 ; 0,-0.1 4330.71,-0.1 ; 275.59,984 3543.31,984 3543.31,747 ; 275.59,984.25 275.59,-984.25 3543.31,-984.25 3543.31,-234 ; 3819,984 3819.15,984 ; 4006,-797 4015.75,-787.25 4015.75,788
  lines w5: 3541.98,-234.75 cw(c3503.94,255.91) 3543.04,746.48